# Altium PCB PCB_Test.PcbDoc
Units mm, origin at the board's own origin, x right, y up, seen from the top; angles counter-clockwise.
Board outline 152.4 x 101.6 mm, 2 copper layers (Top Layer, Bottom Layer); 14 components, 8 nets, 30 pads, 0 vias.
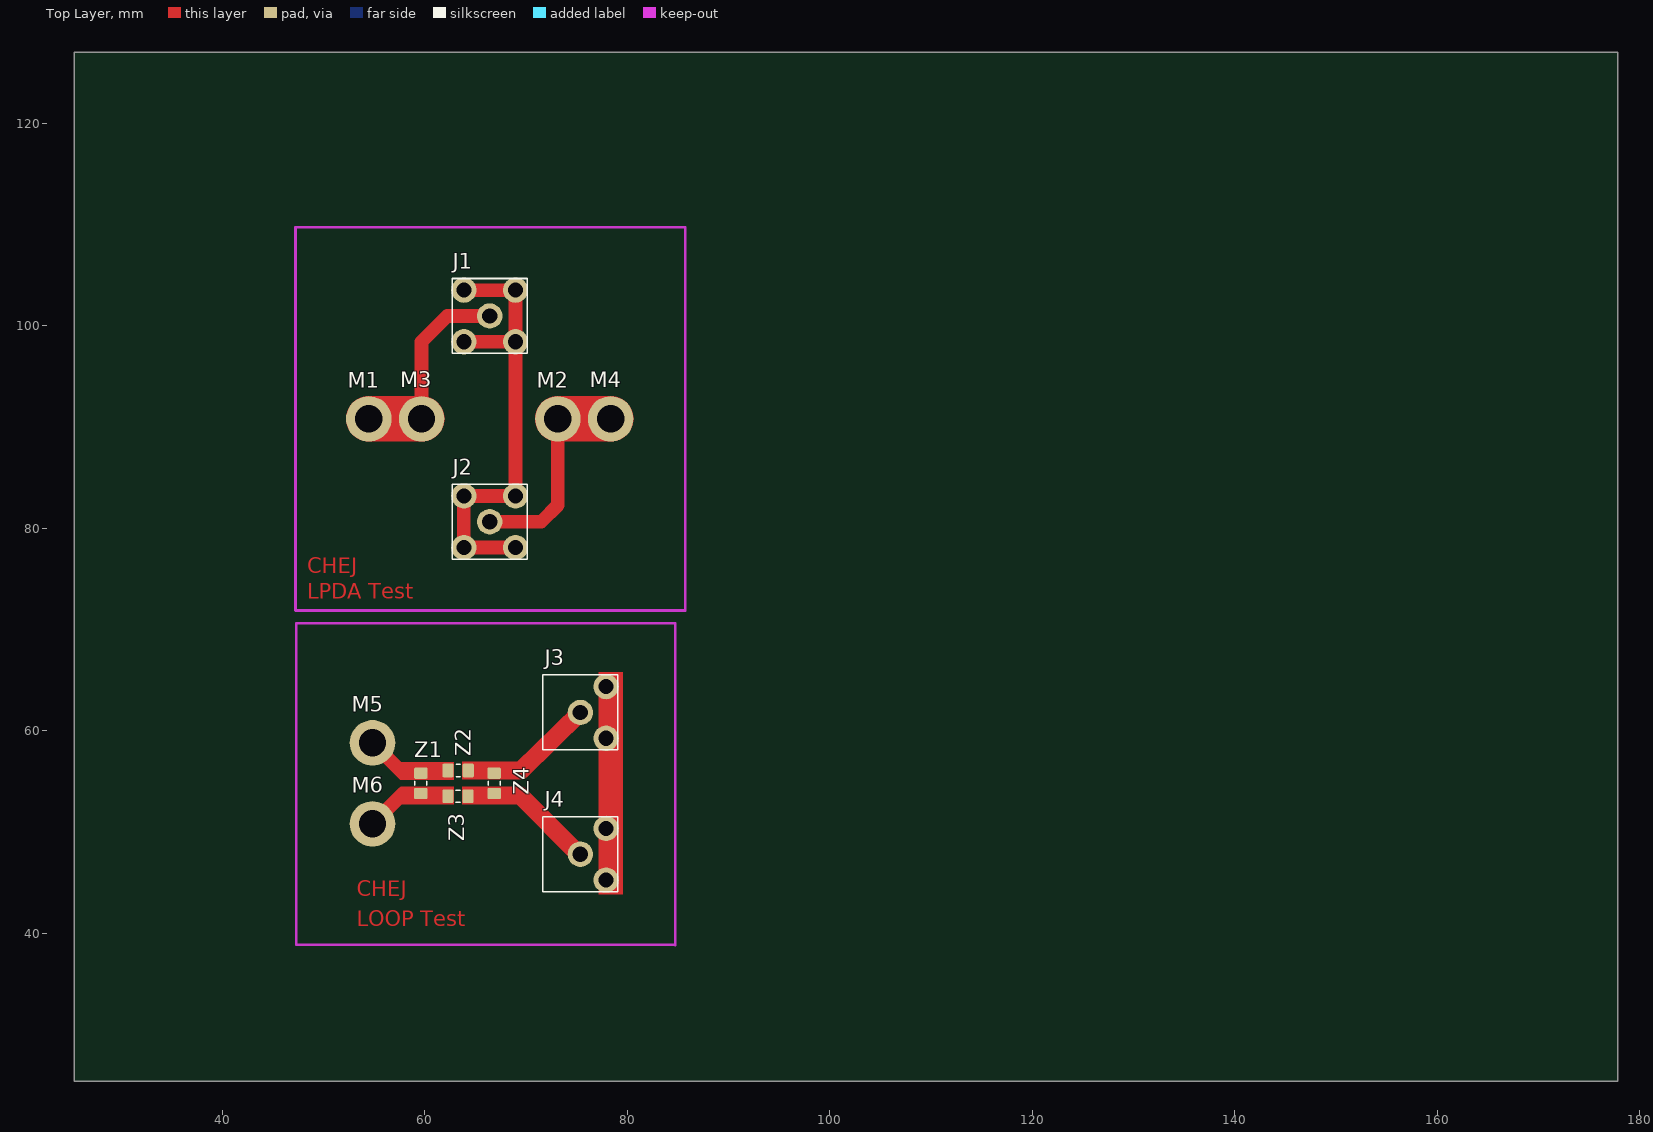
[diagram p0: Top Layer view]
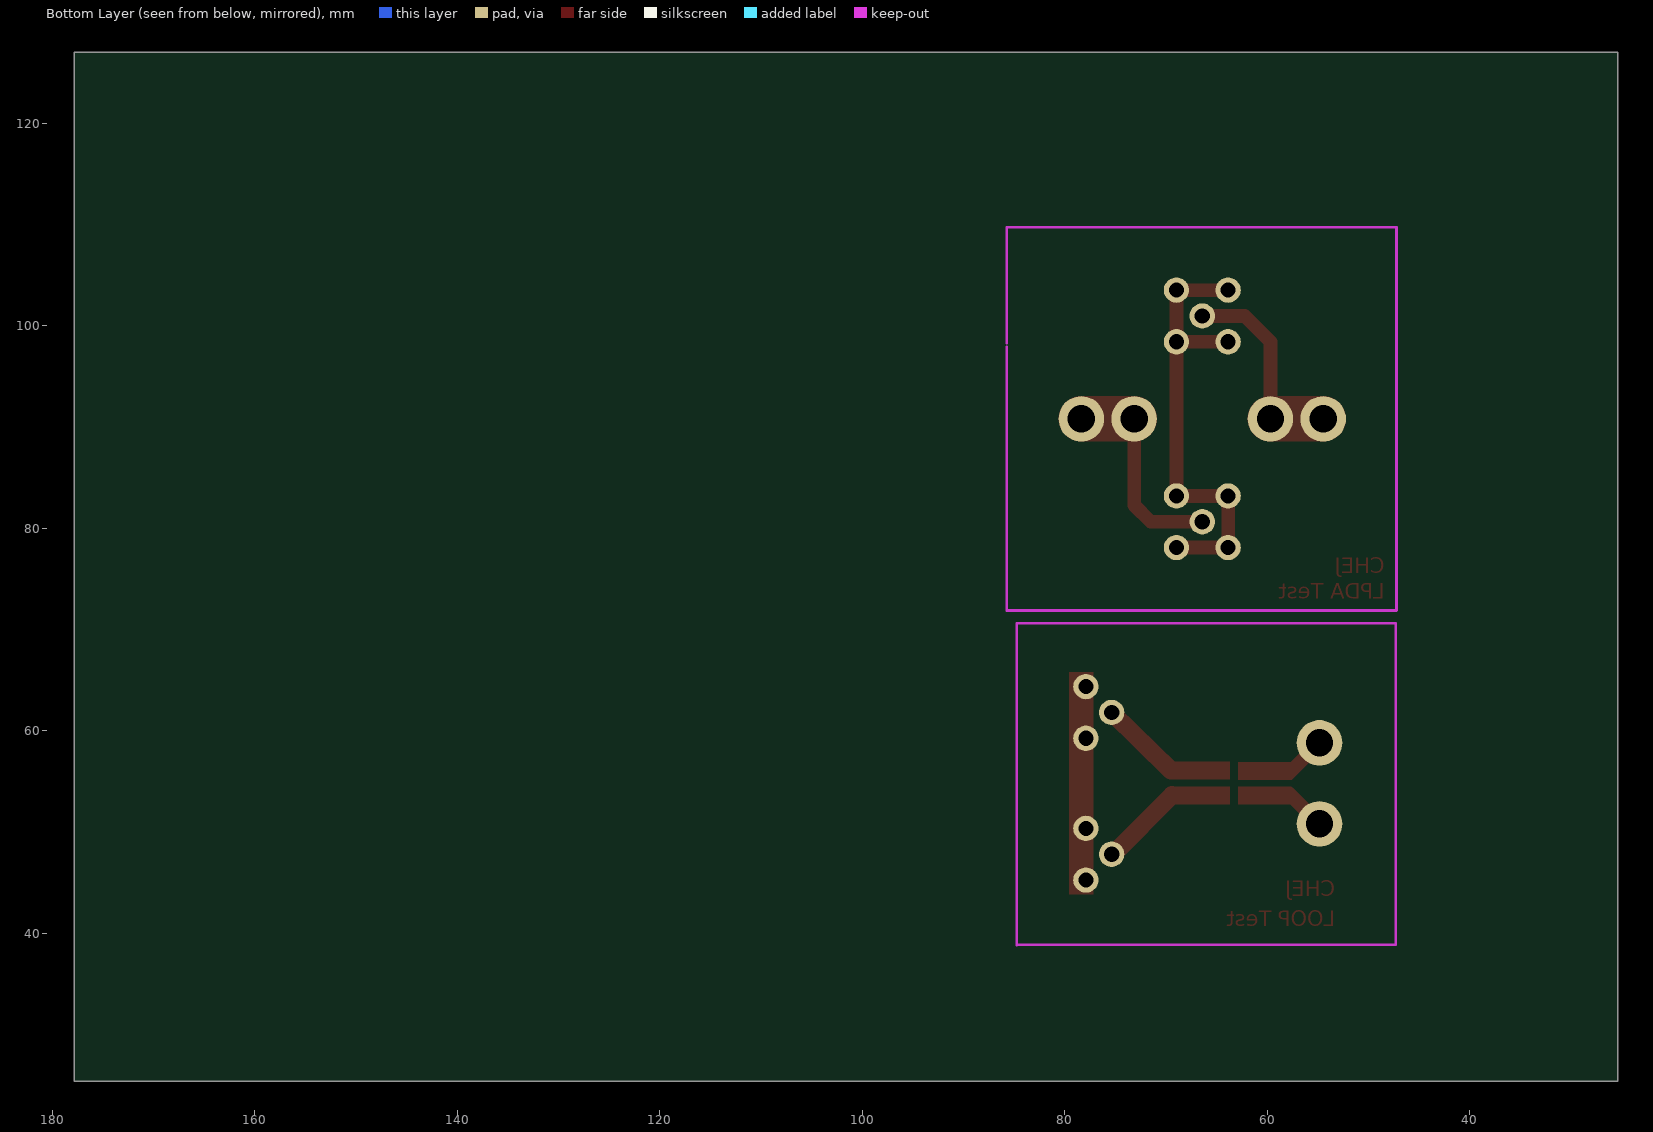
[diagram p1: Bottom Layer view, seen from below]
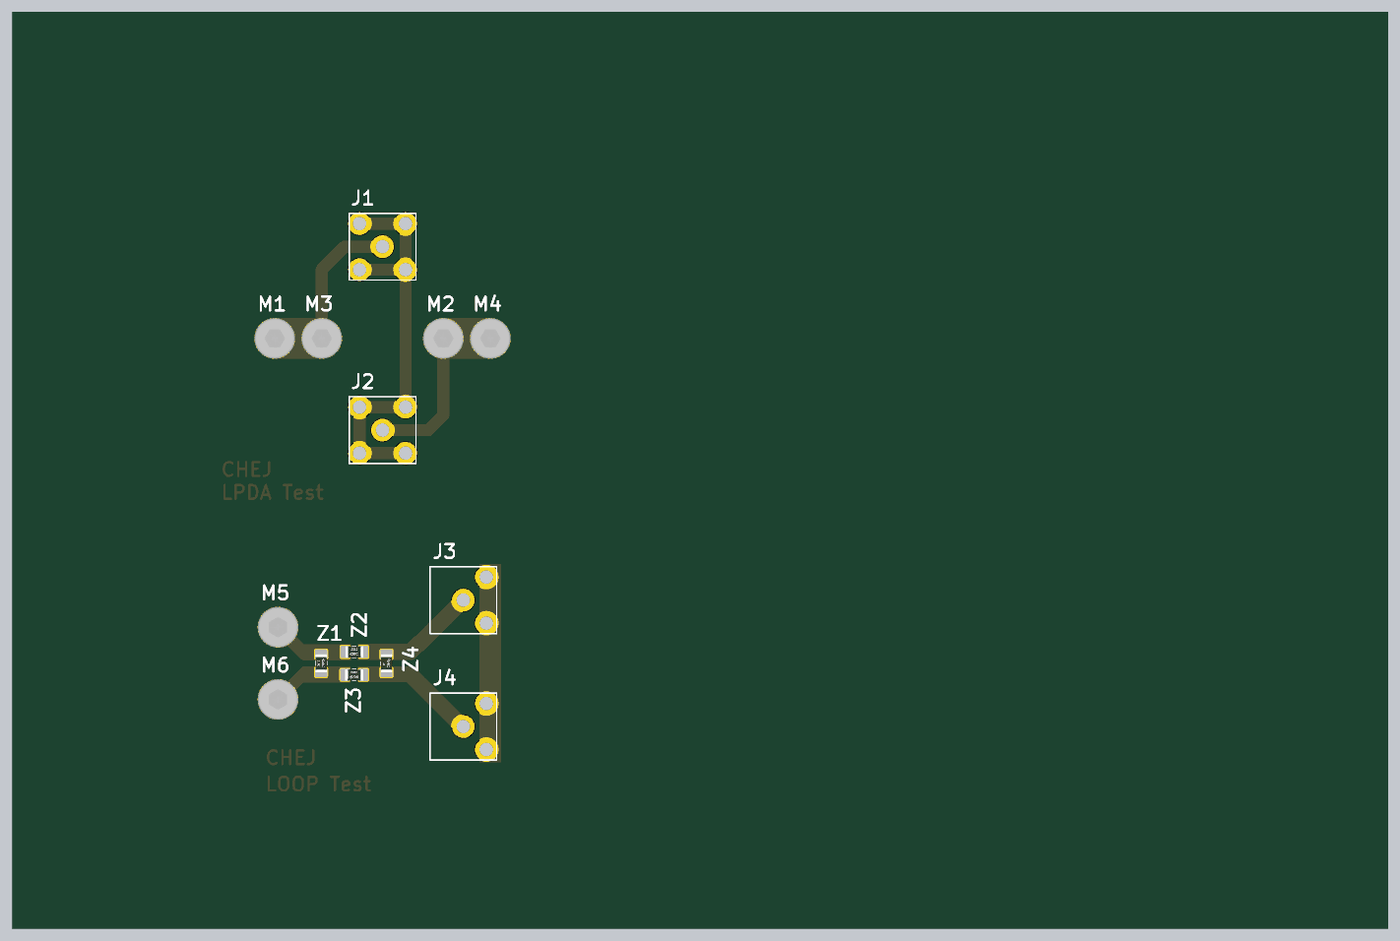
[diagram p2: 3D render of the assembled board from above, using the file's embedded part models]

## Layer stack, top to bottom
Top Solder: solder mask 0.0102, Solder Resist, Dk 3.5
Top Layer: signal copper 0.0356
Dielectric 1: dielectric 0.32, FR-4, Dk 4.8
Bottom Layer: signal copper 0.0356
Bottom Solder: solder mask 0.0102, Solder Resist, Dk 3.5

## Board outline
25.4,25.4 177.8,25.4 177.8,127 25.4,127

## Design rules (kind name [scope] priority, off if disabled: settings)
Clearance [All] p1: gap=0.254 ignorepadtopadclearanceinfootprint=FALSE except(0: Arc-Hole Track-Hole SMDPad-Hole THPad-Hole Via-Hole Fill-Hole Poly-Hole Region-Hole Text-Hole)
PolygonConnect [All] p1: connectstyle=Relief reliefconductorwidth=0.254 reliefentries=4 polygonreliefangle="90 Angle" airgapwidth=0.254
RoutingVias [All] p1: holewidth=0.711 width=1.27 viastyle="Through Hole" minholewidth=0.711 minwidth=1.27 maxholewidth=0.711 maxwidth=1.27
SolderMaskExpansion [All] p1: expansion=0.102
Width [All] p1 off: maxlimit=0.254 minlimit=0.254 preferedwidth=0.254
30 further rules are at their usual default settings.

## Components (designator, comment, footprint, x,y, rotation, side; value= is the part's Value field where it differs from the comment)
J1 "CONSMA001-G" "SMA TH Vertical Linx CONSMA001-G"#1 66.421,100.965 r0 top
J2 "CONSMA001-G" "SMA TH Vertical Linx CONSMA001-G"#1 66.421,80.645 r0 top
J3 "CONSMA001-G" "SMA TH Vertical Linx CONSMA001-G"#2 75.366,61.815 r90 top
J4 "CONSMA001-G" "SMA TH Vertical Linx CONSMA001-G"#2 75.366,47.815 r90 top
M1 "=Value" "Screw Hex Socket M2.5X4 Connected" 54.483,90.805 r0 top
M2 "=Value" "Screw Hex Socket M2.5X4 Connected" 73.152,90.805 r0 top
M3 "=Value" "Screw Hex Socket M2.5X4 Connected" 59.69,90.805 r0 top
M4 "=Value" "Screw Hex Socket M2.5X4 Connected" 78.359,90.805 r0 top
M5 "=Value" "Screw Hex Socket M2.5X4 Connected" 54.844,58.815 r90 top
M6 "=Value" "Screw Hex Socket M2.5X4 Connected" 54.844,50.815 r90 top
Z1 "*" "RESISTOR 2012 REFLOW" 59.618,54.815 r90 top
Z2 "*" "RESISTOR 2012 REFLOW" 63.301,56.085 r0 top
Z3 "*" "RESISTOR 2012 REFLOW" 63.285,53.545 r0 top
Z4 "*" "RESISTOR 2012 REFLOW" 66.857,54.815 r90 top

## Footprints (in the part's own frame and the unit in brackets; to place one, negate y for a bottom-side part, rotate by r counter-clockwise, add the part's x,y. Pads: shape width x height; smd on the part's side, far side on the other; paste and mask are expansions set on the pad)
"RESISTOR 2012 REFLOW" [mm] "Resistor SMD 2.0x1.2mm (0805-imperial)"
  rrect25% 1.1x1.35 smd: 1(-1,0) 2(1,0)
  silkscreen extent -0.2,-0.6 0.2,0.6, body extent -1,-0.62 1,0.63, height 0.45
"Screw Hex Socket M2.5X4 Connected" [mm] "Screw Hex Socket M2.5X4 Connected BN610"
  round 4.5 hole 2.7 paste-5 mask+0: 1(0,0)
  body extent -2.25,-2.25 2.25,2.25, height 2.5
"SMA TH Vertical Linx CONSMA001-G"#1 [mm] "Connector SMA Trough Hole Vertical Linx nr. CONSMA001-G"
  round 2.5 hole 1.5: 1(0,0) 2(-2.55,-2.55) 2(-2.55,2.55) 2(2.55,-2.55) 2(2.55,2.55)
  silkscreen extent -3.7,-3.7 3.7,3.7, body extent -3.5,-3.5 3.5,3.5, height 10.25
"SMA TH Vertical Linx CONSMA001-G"#2 [mm] "Connector SMA Trough Hole Vertical Linx nr. CONSMA001-G"
  round 2.5 hole 1.5: 1(0,0) 2(-2.55,-2.55) 2(2.55,-2.55)
  silkscreen extent -3.7,-3.7 3.7,3.7, body extent -3.5,-3.5 3.5,3.5, height 10.25

## Part data
J1 J2 J3 J4: library part "SMA TH VERTICAL LINX CONSMA001-G", "SMA TH VERTICAL LINX CONSMA001-G"
M1 M2 M3 M4 M5 M6: library part "Screw Hex Socket Connected", "Screw Hex Socket Connected BN610"
Z1 Z2 Z3 Z4: library part Resistor, "Resistor"

## Nets (pads, with @x,y where several pads share a name; then routed paths per layer and width w, separated by ;. In a path a pad name is that pad's centre, name@x,y a point inside that pad or via, vN(x,y) a via of type N, cw(c..) or ccw(c..) an arc to the next point about the centre after c; other vN are vias at no path point)
NetJ1_1: J1.1 M1.1 M3.1 | length 20.6
  Top Layer w1.349: M3.1 59.69,98.425 62.23,100.965 J1.1
  Top Layer w4.5: M1.1 M3.1
NetJ1_2: J1.2 J2.2 | length 45.2
  Top Layer w1.349: J1.2@63.871,98.415 68.971,98.415 68.971,103.515 J1.2@63.871,103.515 ; J2.2@68.971,78.095 63.871,78.095 63.871,83.195 68.971,83.195 J1.2@68.971,97.78
NetJ2_1: J2.1 M2.1 M4.1 | length 21.1
  Top Layer w1.349: J2.1 71.501,80.645 73.152,82.296 M2.1
  Top Layer w4.5: M2.1 M4.1
NetJ3_1: J3.1 Z2.2 Z4.2 | length 8.2
  Top Layer w1.778: 69.505,56.059 J3.1
NetJ3_2: J3.2 J4.2
NetJ4_1: J4.1 Z3.2 Z4.1 | length 8.3
  Top Layer w1.778: 69.397,53.642 J4.1@75.295,47.744
NetM5_1: M5.1 Z1.2 Z2.1 | length 6
  Top Layer w1.349: M5.1 57.844,55.815 Z1.2
NetM6_1: M6.1 Z1.1 Z3.1 | length 6
  Top Layer w1.349: M6.1 57.844,53.815 Z1.1

## Keep-outs
Top Layer:
  lines w0.254: 85.725,97.917 85.725,98.298
Keep-Out Layer:
  lines w0.254: 84.675,38.885 47.324,38.885 47.324,54.76 47.324,70.635 84.748,70.635 ; 84.748,38.845 84.748,70.595 ; 85.725,97.917 85.725,83.439 85.725,71.882 47.244,71.882 47.244,83.439 47.244,90.805 47.244,98.298 47.244,109.728 85.725,109.728 85.725,98.298

## Other copper
Top Layer:
  region net NetJ3_2: 79.557,43.828 79.557,65.799 77.144,65.799 77.144,43.828
  region net NetJ4_1: 63.666,54.496 63.666,52.718 69.682,52.718 69.682,54.496
  region net NetJ3_1: 63.69,56.963 63.69,55.185 69.715,55.185 69.715,56.963
  region net NetM6_1: 62.89,52.707 62.89,54.485 57.606,54.485 57.606,52.707
  region net NetM5_1: 62.91,55.145 62.91,56.923 57.576,56.923 57.576,55.145
  text "CHEJ" at 48.387,75.565 h1.52
  text "LPDA Test" at 48.387,73.025 h1.52
  text "CHEJ" at 53.287,43.642 h1.52
  text "LOOP Test" at 53.287,40.721 h1.52

## Silkscreen, mask and mechanical layers (free items; w line width, h text height)
Mechanical 1:
  lines w0.254: 47.244,90.805 52.197,90.805 ; 47.285,58.36 52.365,58.36 ; 66.294,71.882 66.294,76.962 ; 66.548,104.648 66.548,109.728 ; 74.994,38.885 74.994,43.838 ; 75.004,65.555 75.004,70.635 ; 79.668,54.847 84.748,54.847 ; 80.645,90.932 85.725,90.932
Drill Drawing:
  circle w0.254: c98.984,104.33 r0.843
  lines w0.254: 98.142,99.695 99.827,99.695 99.827,101.38 98.142,101.38 98.142,99.695
  lines w0.381: 96.63,98.557 154.417,98.557 ; 96.63,106.142 154.417,106.142 ; 110.56,94.765 110.56,109.934 ; 124.211,94.765 124.211,109.934 ; 96.63,94.765 154.417,94.765 154.417,109.934 96.63,109.934 96.63,94.765
  text "Symbol" at 98.905,107.279 h1.82
  text "Count" at 111.698,107.279 h1.82
  text "Hole Size" at 125.349,107.279 h1.82
  text "16" at 111.698,103.487 h1.52
  text "59.06mil (1.500mm)" at 125.349,103.487 h1.52
  text "6" at 111.698,99.695 h1.52
  text "106.30mil (2.700mm)" at 125.349,99.695 h1.52
  text "22 Total" at 111.698,95.903 h1.52